# EAGLE board CT_schematic (EAGLE 7.6.0)

Size 100 x 80 mm. Coordinates in mm from the lower left corner, seen from the top.
Outline: 0,0 100,0 100,80 0,80 0,0
Copper layers (1*16): Top 0.035mm / dielectric 1.5mm / Bottom 0.035mm
Design rules "default": minimum track width 10mil, minimum drill 24mil, track to track 8mil, track to pad 8mil, pad to pad 8mil, via to via 8mil, smd to smd 8mil, copper to edge 40mil, drill to drill 8mil, minimum pad ring 10mil, minimum via ring 8mil, stop-mask expansion 4mil, vias tented up to drill 0mil, thermal gap 10mil

## Footprints (pad centres in the part's own frame; a part is rotated, then mirrored left to right if it is on the bottom)
C0603 = smd 0.8 x 0.8: 1 -0.762,0; 2 0.762,0
C0402 = smd 0.5 x 0.5: 1 -0.508,0; 2 0.508,0
C0805 = smd 1.2 x 1.3: 1 -1.016,0; 2 1.016,0
C1210 = smd 1.2 x 2.5: 1 -1.524,0; 2 1.524,0
EXV-9B = smd 2.718 x 1.778: 1 -2.108,0; 2 2.108,0
EXV-9H = smd 3.505 x 1.676: 1 -2.857,0; 2 2.857,0
PJ-037B_PACKAGE = drill 3.7 square: 1 12,0 | drill 3.2 square: 2 6,0
R0603 = smd 0.8 x 0.8: 1 -0.762,0; 2 0.762,0
UFBGA64 = smd 0.2 x 0.2: A1 -1.75,1.75; A2 -1.25,1.75; A3 -0.75,1.75; A4 -0.25,1.75; A5 0.25,1.75; A6 0.75,1.75; A7 1.25,1.75; A8 1.75,1.75; B1 -1.75,1.25; B2 -1.25,1.25; B3 -0.75,1.25; B4 -0.25,1.25; B5 0.25,1.25; B6 0.75,1.25; B7 1.25,1.25; B8 1.75,1.25; C1 -1.75,0.75; C2 -1.25,0.75; C3 -0.75,0.75; C4 -0.25,0.75; C5 0.25,0.75; C6 0.75,0.75; C7 1.25,0.75; C8 1.75,0.75; D1 -1.75,0.25; D2 -1.25,0.25; D3 -0.75,0.25; D4 -0.25,0.25; D5 0.25,0.25; D6 0.75,0.25; D7 1.25,0.25; D8 1.75,0.25; E1 -1.75,-0.25; E2 -1.25,-0.25; E3 -0.75,-0.25; E4 -0.25,-0.25; E5 0.25,-0.25; E6 0.75,-0.25; E7 1.25,-0.25; E8 1.75,-0.25; F1 -1.75,-0.75; F2 -1.25,-0.75; F3 -0.75,-0.75; F4 -0.25,-0.75; F5 0.25,-0.75; F6 0.75,-0.75; F7 1.25,-0.75; F8 1.75,-0.75; G1 -1.75,-1.25; G2 -1.25,-1.25; G3 -0.75,-1.25; G4 -0.25,-1.25; G5 0.25,-1.25; G6 0.75,-1.25; G7 1.25,-1.25; G8 1.75,-1.25; H1 -1.75,-1.75; H2 -1.25,-1.75; H3 -0.75,-1.75; H4 -0.25,-1.75; H5 0.25,-1.75; H6 0.75,-1.75; H7 1.25,-1.75; H8 1.75,-1.75
10100565 = smd 0.8 x 2.35: 1 0,0; 2 1.25,0; 3 2.55,0; 4 4.25,0; 5 5.43,0; 6 6.68,0; 7 7.93,0; 8 9.18,0; 9 11.67,0; 10 14.18,0; 11 15.43,0; 12 16.68,0; 13 17.93,0; 14 19.18,0; 15 21.68,0 | smd 1.5 x 3.1: 16 23.495,-1.375; 20 25.685,-22.875 | smd 1.55 x 3.1: 17 -1.815,-1.375; 21 -1.815,-22.875 | drill 1.1 pad 1.1: 18 21.68,-2.375; 19 0.68,-2.375
USON-8 = smd 0.3 x 0.4: 1 0,0; 2 0.5,0; 3 1,0; 4 1.5,0; 5 1.5,2.4; 6 1,2.4; 7 0.5,2.4; 8 0,2.4 | smd 1.65 x 0.25: 9 0.75,1.2
USB-A-H = drill 0.914: 1 2.718,3.493; 2 2.718,1.003; 3 2.718,-1.003; 4 2.718,-3.493 | drill 2.311: 5 0,-6.566; 6 0,6.566
SOT143B = smd 1 x 0.7: 1 -0.75,-1 | smd 0.6 x 0.7: 2 0.95,-1; 3 0.95,1; 4 -0.95,1
QFN-28 = smd 0.813 x 0.305: 1 -2.451,1.5; 2 -2.451,1; 3 -2.451,0.5; 4 -2.451,0; 5 -2.451,-0.5; 6 -2.451,-1; 7 -2.451,-1.5; 15 2.451,-1.5; 16 2.451,-1; 17 2.451,-0.5; 18 2.451,0; 19 2.451,0.5; 20 2.451,1; 21 2.451,1.5 | smd 0.305 x 0.813: 8 -1.5,-2.451; 9 -1,-2.451; 10 -0.5,-2.451; 11 0,-2.451; 12 0.5,-2.451; 13 1,-2.451; 14 1.5,-2.451; 22 1.5,2.451; 23 1,2.451; 24 0.5,2.451; 25 0,2.451; 26 -0.5,2.451; 27 -1,2.451; 28 -1.5,2.451 | smd 3.607 x 3.607: 29 0,0
SJ-43515TS-SMT-TR = smd 2.2 x 3: 1 0.6,-7.4; 4 3.4,-7.4 | smd 3 x 3: 2 12.8,-7.4; 5 17,-3 | smd 2 x 3: 3 5.3,0; 6 2.5,0 | drill 1.8: P$7 4.5,-3.69; P$8 11.54,-3.69
ABS07-32.768KHZ-7-T = smd 1.1 x 2.4: 1 -2.5,0; 2 0,0
ABLS-12.288MHZ-B4-T = smd 5.6 x 2.8: 1 -3.81,0; 2 5.69,0
ASFL1 = smd 1.7 x 1.5: 1 -1.27,-1.1; 2 1.27,-1.1; 3 1.27,1.1; 4 -1.27,1.1
LP2954 = smd 1.6 x 0.6: 1 -2.475,1.905 | smd 1.55 x 0.6: 2 -2.475,0.635; 3 -2.475,-0.635; 4 -2.475,-1.905; 5 2.475,-1.905; 6 2.475,-0.635; 7 2.475,0.635; 8 2.475,1.905
WSON-8 = smd 0.3 x 0.6: 1 -0.75,0; 2 0.05,0; 3 0.85,0; 4 1.65,0; 5 1.65,3.8; 6 0.85,3.8; 7 0.05,3.8; 8 -0.75,3.8 | smd 3 x 2.6: PAD 0.45,1.9
SON-6 = smd 0.55 x 0.3: 1 -0.355,0.5 | smd 0.52 x 0.3: 2 -0.37,0; 3 -0.37,-0.5; 4 0.37,-0.5; 5 0.37,0; 6 0.37,0.5
SW_4-1437565-2 = smd 1.4 x 2.1: 1 -2.23,4.55; 2 -2.23,-4.55; 3 2.23,4.55; 4 2.23,-4.55
LGM67K-G1J2-24-Z = smd 0.8 x 1.4: A -2,0; C 0,0
NC7SZ125M5X = smd 1.3 x 0.7: 1 -1.3,0.95; 2 -1.3,0; 3 -1.3,-0.95; 4 1.3,-0.95; 5 1.3,0.95

## Placement (x,y rotation side)
C1  1e-06  [C0603]  -73.66,87.63 0 top  (outside the outline)
C2  1e-07  [C0603]  -77.47,87.63 0 top  (outside the outline)
C3  1e-07  [C0603]  -81.28,87.63 0 top  (outside the outline)
C4  1e-07  [C0603]  -15.24,92.71 0 top  (outside the outline)
C5  1e-07  [C0603]  -19.05,92.71 0 top  (outside the outline)
C6  1e-07  [C0603]  -22.86,92.71 0 top  (outside the outline)
C7  4.7e-06  [C0603]  -69.85,87.63 0 top  (outside the outline)
C8  1e-08  [C0603]  -26.67,92.71 0 top  (outside the outline)
C9  1e-06  [C0603]  -30.48,92.71 0 top  (outside the outline)
C10  1e-07  [C0603]  -34.29,92.71 0 top  (outside the outline)
C11  1e-11  [C0402]  -62.23,92.71 0 top  (outside the outline)
C12  1e-11  [C0402]  -66.04,92.71 0 top  (outside the outline)
C13  1e-07  [C0402]  -69.85,92.71 0 top  (outside the outline)
C14  1e-05  [C0805]  -30.48,76.2 0 top  (outside the outline)
C15  1e-07  [C0402]  -73.66,92.71 0 top  (outside the outline)
C16  2.2e-05  [C1210]  -57.15,68.58 0 top  (outside the outline)
C17  2.2e-05  [C1210]  -63.5,68.58 0 top  (outside the outline)
C18  1e-09  [C0402]  -77.47,92.71 0 top  (outside the outline)
C19  1e-09  [C0402]  -81.28,92.71 0 top  (outside the outline)
C20  1e-07  [C0402]  -15.24,97.79 0 top  (outside the outline)
C21  1e-07  [C0402]  -19.05,97.79 0 top  (outside the outline)
C22  1e-07  [C0402]  -22.86,97.79 0 top  (outside the outline)
C23  1e-07  [C0402]  -26.67,97.79 0 top  (outside the outline)
C24  1e-07  [C0402]  -30.48,97.79 0 top  (outside the outline)
C25  1e-05  [C0805]  -35.56,76.2 0 top  (outside the outline)
C26  1e-05  [C0805]  -40.64,76.2 0 top  (outside the outline)
C27  1e-05  [C0805]  -45.72,76.2 0 top  (outside the outline)
C28  1e-05  [C0805]  -50.8,76.2 0 top  (outside the outline)
C29  1e-05  [C0805]  -55.88,76.2 0 top  (outside the outline)
C30  2.2e-11  [C0402]  -54.61,92.71 0 top  (outside the outline)
C31  2.2e-11  [C0402]  -58.42,92.71 0 top  (outside the outline)
C32  1e-08  [C0402]  -34.29,97.79 0 top  (outside the outline)
C33  1e-06  [EXV-9B]  -77.47,68.58 0 top  (outside the outline)
C34  2.2e-06  [EXV-9B]  -16.51,76.2 0 top  (outside the outline)
C35  1e-06  [C0603]  -38.1,92.71 0 top  (outside the outline)
C36  1e-05  [C1210]  -69.85,68.58 0 top  (outside the outline)
C37  1e-07  [C0402]  -38.1,97.79 0 top  (outside the outline)
C38  0.0001  [EXV-9H]  -35.56,60.96 0 top  (outside the outline)
C39  0.0001  [EXV-9H]  -46.99,60.96 0 top  (outside the outline)
C40  1e-08  [C0402]  -41.91,97.79 0 top  (outside the outline)
J1  PJ-037B  [PJ-037B_PACKAGE]  -83.82,36.83 0 top  (outside the outline)
R2  1000.0  [R0603]  -41.91,92.71 0 top  (outside the outline)
R4  4700.0  [R0603]  -45.72,92.71 0 top  (outside the outline)
R5  10000.0  [R0603]  -30.48,87.63 0 top  (outside the outline)
R6  100000.0  [R0603]  -66.04,76.2 0 top  (outside the outline)
R7  100000.0  [R0603]  -71.12,76.2 0 top  (outside the outline)
R8  100000.0  [R0603]  -76.2,76.2 0 top  (outside the outline)
R9  100000.0  [R0603]  -81.28,76.2 0 top  (outside the outline)
R10  100000.0  [R0603]  -15.24,82.55 0 top  (outside the outline)
R11  100000.0  [R0603]  -20.32,82.55 0 top  (outside the outline)
R12  100000.0  [R0603]  -25.4,82.55 0 top  (outside the outline)
R13  100000.0  [R0603]  -30.48,82.55 0 top  (outside the outline)
R14  100000.0  [R0603]  -35.56,82.55 0 top  (outside the outline)
R15  100000.0  [R0603]  -40.64,82.55 0 top  (outside the outline)
R16  100000.0  [R0603]  -45.72,82.55 0 top  (outside the outline)
R17  100000.0  [R0603]  -50.8,82.55 0 top  (outside the outline)
R18  100000.0  [R0603]  -55.88,82.55 0 top  (outside the outline)
R19  100000.0  [R0603]  -60.96,82.55 0 top  (outside the outline)
R20  47000.0  [R0603]  -35.56,87.63 0 top  (outside the outline)
R21  47000.0  [R0603]  -40.64,87.63 0 top  (outside the outline)
R22  47000.0  [R0603]  -45.72,87.63 0 top  (outside the outline)
R23  680.0  [R0603]  -49.53,92.71 0 top  (outside the outline)
R24  100000.0  [R0603]  -66.04,82.55 0 top  (outside the outline)
R25  100000.0  [R0603]  -71.12,82.55 0 top  (outside the outline)
R26  47000.0  [R0603]  -50.8,87.63 0 top  (outside the outline)
R27  100000.0  [R0603]  -76.2,82.55 0 top  (outside the outline)
R28  100000.0  [R0603]  -81.28,82.55 0 top  (outside the outline)
R29  153694.38  [R0603]  -60.96,76.2 0 top  (outside the outline)
R30  100000.0  [R0603]  -15.24,87.63 0 top  (outside the outline)
R31  10000.0  [R0603]  -55.88,87.63 0 top  (outside the outline)
R32  10000.0  [R0603]  -60.96,87.63 0 top  (outside the outline)
R33  82000.0  [R0603]  -66.04,87.63 0 top  (outside the outline)
R34  300000.0  [R0603]  -20.32,87.63 0 top  (outside the outline)
R35  120000.0  [R0603]  -25.4,87.63 0 top  (outside the outline)
U1  STM32L433RCI6  [UFBGA64]  -59.69,49.53 0 top  (outside the outline)
U2  10100565  [10100565]  -40.64,25.4 0 top  (outside the outline)
U3  SST26WF080BT-104I/NP  [USON-8]  -45.72,96.52 0 top  (outside the outline)
U4  61400416021  [USB-A-H]  -50.8,8.89 0 top  (outside the outline)
U5  prtr5v0u2ax  [SOT143B]  -58.42,97.79 0 top  (outside the outline)
U6  WM8731CLSEFL  [QFN-28]  -49.53,68.58 0 top  (outside the outline)
U7  SJ-43515TS-SMT-TR  [SJ-43515TS-SMT-TR]  -39.37,39.37 0 top  (outside the outline)
U8  SJ-43515TS-SMT-TR  [SJ-43515TS-SMT-TR]  -67.31,39.37 0 top  (outside the outline)
U9  ABS07-32.768KHZ-7-T  [ABS07-32.768KHZ-7-T]  -27.94,69.85 0 top  (outside the outline)
U10  ABLS-12.288MHZ-B4-T  [ABLS-12.288MHZ-B4-T]  -64.77,60.96 0 top  (outside the outline)
U11  ASFL1-25MHZ-NCS  [ASFL1]  -26.67,60.96 0 top  (outside the outline)
U12  LP2954AIMX/NOPB  [LP2954]  -44.45,49.53 0 top  (outside the outline)
U13  LP2951ACSDX/NOPB  [WSON-8]  -78.74,46.99 0 top  (outside the outline)
U14  TPS3895ADRYR  [SON-6]  -62.23,96.52 0 top  (outside the outline)
U15  4-1437565-2  [SW_4-1437565-2]  -27.94,50.8 0 top  (outside the outline)
U16  Q65110A2395  [LGM67K-G1J2-24-Z]  -36.83,68.58 0 top  (outside the outline)
U17  nc7sz125m5x  [NC7SZ125M5X]  -24.13,76.2 0 top  (outside the outline)

## Library data of the parts
C1-C40 J1 R2 R4-R35 U1-U17 = circuit_tree

## Nets
CLK_CRYSTAL_U1_A1: C11.1 U1.A1 U9.1
CLK_CRYSTAL_U1_B1: C12.1 U1.B1 U9.2
CLK_CRYSTAL_U6_1: C30.1 U6.1 U10.1
CLK_CRYSTAL_U6_2: C31.1 U6.2 U10.2
CLK_U1_C1: U1.C1 U11.3
GND: C1.2 C2.2 C3.2 C4.2 C5.2 C6.2 C7.2 C8.2 C9.2 C10.2 C11.2 C12.2 C13.2 C14.2 C15.2 C19.2 C20.2 C21.2 C22.2 C23.2 C24.2 C25.2 C26.2 C27.2 C28.2 C29.2 C30.2 C31.2 C32.2 C33.2 C34.2 C35.2 C36.2 C37.2 C38.2 C39.2 C40.2 J1.2 R2.2 R5.2 R20.2 R21.2 R22.2 R27.2 R30.2 R33.2 R35.2 U1.C2 U1.D4 U1.D5 U1.D6 U1.F1 U2.6 U2.10 U2.12 U2.16 U2.17 U2.20 U2.21 U3.4 U3.9 U4.4 U4.5 U4.6 U5.1 U6.4 U6.15 U6.19 U6.25 U6.26 U6.29 U7.1 U8.1 U11.2 U12.4 U13.3 U13.4 U13.PAD U14.2 U16.C U17.1 U17.3
NET_U1_B4: R5.1 U1.B4
NET_U1_E1: R4.1 U1.E1 U17.4
NET_U1_H7: U16.A
NET_U1_H8: U15.3 U15.4
NET_U2_1: R8.1 U2.1
NET_U2_2: R7.1 U2.2
NET_U2_18: U2.18 U2.19
NET_U5_4: U4.1 U5.4
NET_U6_9: U6.9
NET_U6_20: C24.1 C29.1 U6.20
NET_U7_2: C17.1 R21.1 U7.2
NET_U7_5: C16.1 R20.1 U7.5
NET_U7_13: C16.2
NET_U7_14: C17.2
NET_U8_5: C18.1 C19.1 R22.1 R23.1 U8.5
NET_U8_21: R23.2
NET_U8_22: C18.2
NET_U12_3: R25.1 U12.3
NET_U12_5: R24.1 U12.5
NET_U12_7: R26.2 R27.1 U12.7
NET_U13_5: R28.1 U13.5
NET_U13_7: R29.2 R30.1 U13.7
NET_U14_1: R32.1 R33.1 U14.1
NET_U14_3: R34.2 R35.1 U14.3
NET_U14_4: R31.1 U14.4 U17.2
NET_U15_1: R2.1 U15.1 U15.2
PROC_QUADSPI_BK1_IO0: U1.G5 U3.5
PROC_QUADSPI_BK1_IO1: U1.F5 U3.2
PROC_QUADSPI_BK1_IO2: R18.1 U1.H4 U3.3
PROC_QUADSPI_BK1_IO3: R19.1 U1.G4 U3.7
PROC_QUADSPI_BK1_NCS: R17.1 U1.F3 U3.1
PROC_QUADSPI_CLK: U1.G3 U3.6
PROC_SAI1_FS_A: U1.C7 U6.9 U6.11
PROC_SAI1_SCK_A: U1.D7 U6.7
PROC_SAI1_SD_A: U1.C6 U6.8
PROC_SDMMC1_CK: R6.1 U1.C5 U2.8
PROC_SDMMC1_D0: R9.1 U1.E8 U2.4
PROC_SDMMC1_D1: R10.1 U1.D8 U2.3
PROC_SDMMC1_D2: R11.1 U1.B7 U2.15
PROC_SDMMC1_D3: R12.1 U1.B6 U2.14
PROC_SDMMC1_D4: R13.1 U1.B3 U2.13
PROC_SDMMC1_D5: R14.1 U1.A3 U2.11
PROC_SDMMC1_D6: R15.1 U1.F6 U2.7
PROC_SDMMC1_D7: R16.1 U1.E7 U2.5
PROC_USB_DM: U1.C8 U4.2 U5.3
PROC_USB_DP: U1.B8 U4.3 U5.2
VCC_S1_11V0: C33.1 C35.1 C38.1 C39.1 J1.1 R25.2 U12.8 U13.8
VCC_TIER1_1V8: C1.1 C2.1 C3.1 C4.1 C5.1 C6.1 C7.1 C13.1 C14.1 C15.1 C20.1 C21.1 C22.1 C23.1 C25.1 C26.1 C27.1 C28.1 C34.1 C37.1 C40.1 R4.2 R6.2 R7.2 R8.2 R9.2 R10.2 R11.2 R12.2 R13.2 R14.2 R15.2 R16.2 R17.2 R18.2 R19.2 R24.2 R26.1 R31.2 R32.2 R34.1 U1.B2 U1.D2 U1.E4 U1.E6 U2.9 U3.8 U6.3 U6.5 U6.12 U6.18 U12.1 U14.6 U17.5
VCC_TIER1_3V3: C8.1 C9.1 C10.1 C32.1 C36.1 R28.2 R29.1 U1.E5 U1.H1 U11.4 U13.1

## Tracks (layer width: path | path; a pad name or v marks a point on that pad's centre or on a via)
CLK_CRYSTAL_U1_A1  (2 unrouted)
CLK_CRYSTAL_U1_B1  (2 unrouted)
CLK_CRYSTAL_U6_1  (2 unrouted)
CLK_CRYSTAL_U6_2  (2 unrouted)
CLK_U1_C1  (1 unrouted)
GND  (81 unrouted)
NET_U1_B4  (1 unrouted)
NET_U1_E1  (2 unrouted)
NET_U1_H8  (1 unrouted)
NET_U2_1  (1 unrouted)
NET_U2_2  (1 unrouted)
NET_U2_18  (1 unrouted)
NET_U5_4  (1 unrouted)
NET_U6_20  (2 unrouted)
NET_U7_2  (2 unrouted)
NET_U7_5  (2 unrouted)
NET_U8_5  (4 unrouted)
NET_U12_3  (1 unrouted)
NET_U12_5  (1 unrouted)
NET_U12_7  (2 unrouted)
NET_U13_5  (1 unrouted)
NET_U13_7  (2 unrouted)
NET_U14_1  (2 unrouted)
NET_U14_3  (2 unrouted)
NET_U14_4  (2 unrouted)
NET_U15_1  (2 unrouted)
PROC_QUADSPI_BK1_IO0  (1 unrouted)
PROC_QUADSPI_BK1_IO1  (1 unrouted)
PROC_QUADSPI_BK1_IO2  (2 unrouted)
PROC_QUADSPI_BK1_IO3  (2 unrouted)
PROC_QUADSPI_BK1_NCS  (2 unrouted)
PROC_QUADSPI_CLK  (1 unrouted)
PROC_SAI1_FS_A  (2 unrouted)
PROC_SAI1_SCK_A  (1 unrouted)
PROC_SAI1_SD_A  (1 unrouted)
PROC_SDMMC1_CK  (2 unrouted)
PROC_SDMMC1_D0  (2 unrouted)
PROC_SDMMC1_D1  (2 unrouted)
PROC_SDMMC1_D2  (2 unrouted)
PROC_SDMMC1_D3  (2 unrouted)
PROC_SDMMC1_D4  (2 unrouted)
PROC_SDMMC1_D5  (2 unrouted)
PROC_SDMMC1_D6  (2 unrouted)
PROC_SDMMC1_D7  (2 unrouted)
PROC_USB_DM  (2 unrouted)
PROC_USB_DP  (2 unrouted)
VCC_S1_11V0  (7 unrouted)
VCC_TIER1_1V8  (53 unrouted)
VCC_TIER1_3V3  (10 unrouted)